# EAGLE board slaveMeteo (EAGLE 9.0.0)

No outline drawn. Coordinates in mm, seen from the top.
Copper layers (1*16): Top 0.035mm / dielectric 1.5mm / Bottom 0.035mm
Design rules "default": minimum track width 6mil, minimum drill 0.35mm, track to track 6mil, track to pad 6mil, pad to pad 6mil, via to via 6mil, smd to smd 6mil, copper to edge 40mil, drill to drill 6mil, minimum pad ring 10mil, minimum via ring 8mil, stop-mask expansion 4mil, vias tented up to drill 0mil, thermal gap 10mil
Net classes: 0 default: width 0.406 mm, clearance 0.25 mm; 1 power: width 0.406 mm, drill 0.305 mm, clearance 0.25 mm

## Footprints (pad centres in the part's own frame; a part is rotated, then mirrored left to right if it is on the bottom)
C805 = smd 1.3 x 1.5: 1 -0.95,0; 2 0.95,0
C0805K = smd 1.3 x 1.6: 1 -1,0; 2 1,0
RJ12-RIGHTANGLE-I2C = drill 0.8 pad 1.3: +5V -1.54,4.84; +12V 2.54,4.84; GND1 -2.54,2.3; GND2 -0.5,2.3; SCL 1.54,2.3; SDA 0.5,4.84 | hole 2.36: -6,0; 6,0
PHOTOCELL = drill 0.8 pad 1.676: 1 -2,0; 2 2,0
R0805 = smd 1.3 x 1.5: 1 -0.95,0; 2 0.95,0
TRIMMER_3362P = drill 0.8: 1 -2.54,-0.31; 2 0,2.54; 3 2.54,-0.31
TACTILE-SWITCH-SMD-ALT01 = smd 1.524 x 0.762: 1 -2.794,1.905; 2 2.794,1.905; 3 -2.794,-1.905; 4 2.794,-1.905
RHT03_DHT-22/RA = drill 0.8: DATA -1.27,0; GND 3.81,0; NULL 1.27,0 | drill 0.8 octagon: VDD -3.81,0 | hole 3.25: 0,24.5
TQFP32-08 = smd 1.27 x 0.559: 1 -4.293,2.8; 2 -4.293,2; 3 -4.293,1.2; 4 -4.293,0.4; 5 -4.293,-0.4; 6 -4.293,-1.2; 7 -4.293,-2; 8 -4.293,-2.8; 17 4.293,-2.8; 18 4.293,-2; 19 4.293,-1.2; 20 4.293,-0.4; 21 4.293,0.4; 22 4.293,1.2; 23 4.293,2; 24 4.293,2.8 | smd 0.559 x 1.27: 9 -2.8,-4.293; 10 -2,-4.293; 11 -1.2,-4.293; 12 -0.4,-4.293; 13 0.4,-4.293; 14 1.2,-4.293; 15 2,-4.293; 16 2.8,-4.293; 25 2.8,4.293; 26 2,4.293; 27 1.2,4.293; 28 0.4,4.293; 29 -0.4,4.293; 30 -1.2,4.293; 31 -2,4.293; 32 -2.8,4.293
DS1820 = drill 0.8: DQ 2.54,-1.27; GND 0.635,-1.27; VDD 4.445,-1.27
MS5637 = smd 1 x 1: GND 1,1; SCL 1,-1; SDA -1,-1; VDD -1,1
1503_09 = drill 0.8 pad 1.2 long: 1 0,-2.1; 2 -4.55,-5.4; 3 5.05,-9.9; 4 -4,-13.1; 5 2.65,-8.5

## Placement (x,y rotation side)
C1  100nF  [C805]  2.54,39.37 0 top
C2  100nF  [C0805K]  30.48,13.97 0 top
C3  100nF  [C0805K]  36.83,13.97 0 top
C4  100nF  [C0805K]  43.18,13.97 0 top
J1  RJ12RIGHTANGLE-I2C  [RJ12-RIGHTANGLE-I2C]  25.4,74.93 0 top
R1  PHOTOCELLPTH  [PHOTOCELL]  52.07,57.15 0 top
R2  [R0805]  54.93,64.77 0 top
R3  [R0805]  19.05,52.07 0 top
R4  100k  [R0805]  2.54,33.02 0 top
R5  [R0805]  2.54,26.67 0 top
R6  10k  [TRIMMER_3362P]  83.82,16.51 0 top
R7  [R0805]  2.54,20.32 0 top
R8  100k  [R0805]  2.54,13.97 0 top
R9  10k  [R0805]  71.12,33.02 0 top
S1  Reset  [TACTILE-SWITCH-SMD-ALT01]  34.29,7.62 0 top
U1  [RHT03_DHT-22/RA]  53.34,72.39 0 top
U3  ATMEGA328  [TQFP32-08]  40.64,35.56 0 top
U$1  DS1820TO92  [DS1820]  40.64,66.04 0 top
U$19  MS5637  [MS5637]  73.66,41.91 0 top
X1  1503_09  [1503_09]  60.96,15.24 0 top

## Library data of the parts
C1 R6 = dp_devices
C2-C4 = rcl; ELECROW: C49678; LCSC: C49678; MPN: 80-C1206C104K5R
J1 = lpatiny
R1 U3 = SparkFun
R2-R5 R7 R8 = resistor
R9 = rcl; ELECROW: C17513; LCSC: C17513
S1 = Testing
U1 = RHT03_DHT-22_AM2302; PROD_ID: SEN-10167
U$1 = Ava
U$19 = MS5637
X1 = con-lumberg; OC_FARNELL: 1243244; OC_NEWARK: unknown

## Nets
3.3V: J1.+5V
+5V: R1.1 R3.2 R4.2 U1.VDD U$1.VDD
A0: R3.1 U3.23 U$1.DQ
A1: R1.2 R2.1 U3.24
A2: U1.DATA U3.25
A3: U3.26
A6: J1.GND2 U3.19
A7: U3.22
AREF: C3.1 U3.20
D2: U3.32
D3: U3.1
D4: U3.2
D5: U3.9
D6: U3.10
D7: U3.11
D8: U3.12
D9: U3.13
D10: U3.14
DTR: C2.1
GND [power]: C3.2 C4.2 J1.GND1 R2.2 S1.1 S1.2 U1.GND U3.3 U3.5 U3.21 U$1.GND U$19.GND
GND1 [power]: R6.1
GND2 [power]: R8.1 X1.3
MISO: U3.16
MOSI: U3.15
N$4: J1.+12V
N$5: C1.1 R4.1 R8.2
N$14 [power]: C1.2 X1.1
N$21 [power]: X1.2
RESET: C2.2 R9.1 S1.3 S1.4 U3.29
RX: U3.30
SCK: U3.17
SCL: J1.SCL U3.28 U$19.SCL
SDA: J1.SDA U3.27 U$19.SDA
TX: U3.31
VCC: C4.1 R9.2 U3.4 U3.6 U3.18 U$19.VDD

## Tracks (layer width: path | path; a pad name or v marks a point on that pad's centre or on a via)
+5V  (4 unrouted)
A0  (2 unrouted)
A1  (2 unrouted)
A2  (1 unrouted)
A6  (1 unrouted)
AREF  (1 unrouted)
GND  (11 unrouted)
GND2  (1 unrouted)
N$5  (2 unrouted)
N$14  (1 unrouted)
RESET  (4 unrouted)
SCL  (2 unrouted)
SDA  (2 unrouted)
VCC  (5 unrouted)